# EAGLE board Main&MotorBoard (EAGLE 9.7.0)

Size 655.3 x 634.67 mm. Coordinates in mm from the lower left corner, seen from the top.
Outline: 0,3.81 650.22,0 655.3,630.86 5.08,634.67 0,3.81
Copper layers (1*16): Top / Bottom
Stack-up Default Layer Stack: Top User Defined 0.035mm / Dielectric-1 User Defined 1.5mm / Bottom User Defined 0.035mm
Design rules: minimum copper width class=1 24mil, minimum copper width class=0 18mil, minimum copper width 6mil, minimum drill size 0.35mm, copper clearance class=1 to class=1 16mil, copper clearance class=0 to class=0 14mil, copper clearance wire_polygon to wire_polygon 6mil, copper clearance wire_polygon to pad_smd 6mil, copper clearance wire_polygon to via 6mil, copper clearance pad_smd to pad_smd 6mil, copper clearance pad_smd to via 6mil, copper clearance via to via 6mil, copper clearance smd to pad (same net) 6mil, copper clearance smd to via (same net) 6mil, copper clearance smd to smd (same net) 6mil, dimension clearance 40mil, via restrict clearance 0mil, restrict clearance 0mil, drill distance 6mil, keepout clearance 0mil
Net classes: 0 Signal: width 0.457 mm, clearance 0.356 mm; 1 Power: width 0.61 mm, clearance 0.406 mm

## Footprints (pad centres in the part's own frame; a part is rotated, then mirrored left to right if it is on the bottom)
RASPBERRY_PI_PICO_PTH = drill 1 long: 1 -8.89,25.4; 2 -8.89,22.86; 3 -8.89,20.32; 4 -8.89,17.78; 5 -8.89,15.24; 6 -8.89,12.7; 7 -8.89,10.16; 8 -8.89,7.62; 9 -8.89,5.08; 10 -8.89,2.54; 11 -8.89,0; 12 -8.89,-2.54; 13 -8.89,-5.08; 14 -8.89,-7.62; 15 -8.89,-10.16; 16 -8.89,-12.7; 17 -8.89,-15.24; 18 -8.89,-17.78; 19 -8.89,-20.32; 20 -8.89,-22.86; 21 8.89,-22.86; 22 8.89,-20.32; 23 8.89,-17.78; 24 8.89,-15.24; 25 8.89,-12.7; 26 8.89,-10.16; 27 8.89,-7.62; 28 8.89,-5.08; 29 8.89,-2.54; 30 8.89,0; 31 8.89,2.54; 32 8.89,5.08; 33 8.89,7.62; 34 8.89,10.16; 35 8.89,12.7; 36 8.89,15.24; 37 8.89,17.78; 38 8.89,20.32; 39 8.89,22.86; 40 8.89,25.4; D1 -2.54,-22.63; D2 0,-22.63; D3 2.54,-22.63
0204/7 = drill 0.813 octagon: 1 -3.81,0; 2 3.81,0
C0805(N) = smd 1 x 1.424: 1 -0.935,0; 2 0.935,0
C0805(M) = smd 1.2 x 1.524: 1 -1.035,0; 2 1.035,0
C0805 = smd 1.3 x 1.5: 1 -0.95,0; 2 0.95,0
2X01-3.00MM-90° = drill 1.02 pad 1.778: 1 0,7.32; 2 0,4.32 | hole 3: 0,0
1X06-2.54MM = drill 1.016 long: 1 -6.35,0; 2 -3.81,0; 3 -1.27,0; 4 1.27,0; 5 3.81,0; 6 6.35,0
SW_DS01C-254-L-04BE = drill 1 pad 1.58 square: 1A -3.81,-3.81 | drill 1 pad 1.58: 1B -3.81,3.81; 2A -1.27,-3.81; 2B -1.27,3.81; 3A 1.27,-3.81; 3B 1.27,3.81; 4A 3.81,-3.81; 4B 3.81,3.81
E5-10,5 = drill 1.016 pad 2.54: + -2.54,0 | drill 1.016 pad 2.54 octagon: - 2.54,0
DO201-15(N) = drill 1.499 long: A 7.62,0; C -7.62,0
SMC = smd 2.8 x 3.8: A 3.7,0; C -3.7,0
7395-02 = drill 1.016 long: 1 1.27,0; 2 -1.27,0
2,8-PAD = drill 2.8 pad 5.334: B2,8 0,0
SAMTEC_MTMM-101-X-X-S-X = drill 0.89 pad 1.24: 01 0,0
DR127 = smd 3.85 x 5.5: 1 -4.975,0; 2 4.975,0
SML0402 = smd 0.6 x 0.6: 1 -0.55,0; 2 0.55,0
DIL04 = drill 0.813 long: 1 -1.27,-3.81; 2 1.27,-3.81; 3 1.27,3.81; 4 -1.27,3.81
TO254P1052X465X1989-3 = drill 1.34 pad 2.01: D 0,0; G -2.54,0; S 2.54,0
TO-236AB_NEX-M = smd 0.584 x 1.473: 1 -0.953,-1.079; 2 0.953,-1.079; 3 0,1.079
R0805 = smd 1.3 x 1.5: 1 -0.95,0; 2 0.95,0
C0603(M) = smd 0.762 x 1.062: 1 -0.75,0; 2 0.75,0
C1206(N) = smd 1.02 x 1.729: 1 -1.455,0; 2 1.455,0
2X04 = drill 1.016 octagon: 1 -3.81,-1.27; 2 -3.81,1.27; 3 -1.27,-1.27; 4 -1.27,1.27; 5 1.27,-1.27; 6 1.27,1.27; 7 3.81,-1.27; 8 3.81,1.27
B3F-10XX = drill 1.016 long: 1 -3.251,2.261; 2 3.251,2.261; 3 -3.251,-2.261; 4 3.251,-2.261
MULTIWATT-15 = drill 1.2 long: 1 -8.89,-7.62; 2 -7.62,-2.54; 3 -6.35,-7.62; 4 -5.08,-2.54; 5 -3.81,-7.62; 6 -2.54,-2.54; 7 -1.27,-7.62; 8 0,-2.54; 9 1.27,-7.62; 10 2.54,-2.54; 11 3.81,-7.62; 12 5.08,-2.54; 13 6.35,-7.62; 14 7.62,-2.54; 15 8.89,-7.62
TO263-5 = smd 1.067 x 2.159: FDB 1.702,-5.791; GND 0,-5.791; ON/OFF 3.404,-5.791; OUT -1.702,-5.791; VIN -3.404,-5.791 | smd 10.8 x 10.41: TAB 0,2.54
SOT230P700X170-4 = smd 1.86 x 0.898: 1 -3.075,2.3; 2 -3.075,0; 3 -3.075,-2.3 | smd 1.86 x 3.189: 4 3.075,0
SO14(M) = smd 2.265 x 0.642: 1 -2.525,3.81; 2 -2.525,2.54; 3 -2.525,1.27; 4 -2.525,0; 5 -2.525,-1.27; 6 -2.525,-2.54; 7 -2.525,-3.81; 8 2.525,-3.81; 9 2.525,-2.54; 10 2.525,-1.27; 11 2.525,0; 12 2.525,1.27; 13 2.525,2.54; 14 2.525,3.81

## Placement (x,y rotation side)
A1  RASPBERRY_PI_PICO_PTH  [RASPBERRY_PI_PICO_PTH]  335.28,339.09 0 top
BUZZER  [0204/7]  182.88,71.12 0 top
C1  100nF/50V/10%  [C0805(N)]  129.54,320.04 0 top
C2  100nF/50V/10%  [C0805(N)]  129.54,279.4 0 top
C3  100nF/50V/10%  [C0805(N)]  109.22,292.1 270 top
C4  100nF/50V/10%  [C0805(N)]  130.81,240.03 0 top
C5  100nF/50V/10%  [C0805(N)]  106.68,251.46 270 top
C6  100nF/25V/10%  [C0805(M)]  140.97,483.87 270 top
C6.1  100nF/50V/10%  [C0805]  505.46,292.1 0 top
C6.30  1uF/25V/10%  [C0805]  101.6,78.74 0 top
C6.31  100nF/50V/10%  [C0805]  102.87,71.12 0 top
C7  100nF/25V/10%  [C0805(M)]  148.59,483.87 270 top
C8  10uF/25V/10%  [C0805(M)]  125.73,406.4 90 top
C9  10uF/25V/10%  [C0805(M)]  153.67,406.4 90 top
C10  100nF/25V/10%  [C0805(M)]  219.71,453.39 90 top
C11  100nF/25V/10%  [C0805(M)]  114.3,444.5 270 top
C12  100nF/25V/10%  [C0805(M)]  114.3,406.4 90 top
C13  100nF/25V/10%  [C0805(M)]  166.37,406.4 90 top
C14  100nF/50V/10%  [C0805(N)]  107.95,330.2 270 top
C15  100nF/50V/10%  [C0805(M)]  354.33,369.57 0 top
C16  100nF/50V/10%  [C0805(M)]  542.29,448.31 0 top
C22  100nF/50V/10%  [C0805(M)]  499.11,400.05 0 top
CON1  [2X01-3.00MM-90°]  111.76,486.41 0 top
CON2  [2X01-3.00MM-90°]  187.96,306.07 270 top
CON3  [1X06-2.54MM]  529.59,332.74 0 top
CON4  [2X01-3.00MM-90°]  214.63,262.89 270 top
CON5  [2X01-3.00MM-90°]  184.15,332.74 270 top
CON6  [SW_DS01C-254-L-04BE]  153.67,186.69 0 top
CPOL1  330uF/25V/20%  [E5-10,5]  158.75,483.87 0 top
CPOL2  330uF/25V/20%  [E5-10,5]  175.26,483.87 0 top
CPOL6  100uF/35V/20%  [E5-10,5]  125.73,444.5 0 top
CPOL7  330uF/25V/20%  [E5-10,5]  173.99,453.39 90 top
CPOL8  330uF/25V/20%  [E5-10,5]  191.77,453.39 90 top
CPOL9  330uF/25V/20%  [E5-10,5]  208.28,453.39 90 top
D0  [DO201-15(N)]  166.37,326.39 0 top
D1  [DO201-15(N)]  204.47,326.39 0 top
D2  [DO201-15(N)]  166.37,337.82 0 top
D3  [DO201-15(N)]  204.47,337.82 0 top
D4  [DO201-15(N)]  167.64,299.72 0 top
D5  [DO201-15(N)]  199.39,288.29 0 top
D6  [DO201-15(N)]  179.07,288.29 0 top
D7  [DO201-15(N)]  158.75,288.29 0 top
D8  [DO201-15(N)]  194.31,252.73 0 top
D9  [DO201-15(N)]  173.99,252.73 0 top
D10  [DO201-15(N)]  153.67,252.73 0 top
D11  [DO201-15(N)]  168.91,243.84 0 top
D13  40V/3A  [SMC]  138.43,434.34 180 top
EMISSOR  22-05-7028-02  [7395-02]  417.83,449.58 0 top
HL1  MOUNT-PAD-ROUND2.8  [2,8-PAD]  223.52,487.68 0 top
HL2  MOUNT-PAD-ROUND2.8  [2,8-PAD]  223.52,480.06 0 top
HL3  MOUNT-PAD-ROUND2.8  [2,8-PAD]  223.52,472.44 0 top
J1  PIN_HEADE_1  [SAMTEC_MTMM-101-X-X-S-X]  175.26,415.29 0 top
J2  PIN_HEADE_1  [SAMTEC_MTMM-101-X-X-S-X]  233.68,461.01 0 top
J3  PIN_HEADE_1  [SAMTEC_MTMM-101-X-X-S-X]  191.77,491.49 0 top
J4  PIN_HEADE_1  [SAMTEC_MTMM-101-X-X-S-X]  191.77,481.33 0 top
L2  100uH/1.96A/20%  [DR127]  167.64,436.88 180 top
LED1  GREEN  [SML0402]  167.64,93.98 0 top
LED2  GREEN  [SML0402]  167.64,85.09 0 top
LED3  GREEN  [SML0402]  530.86,323.85 0 top
LED4  RED  [SML0402]  171.45,68.58 0 top
LED5  GREEN  [SML0402]  491.49,320.04 0 top
LED6  GREEN  [SML0402]  487.68,320.04 0 top
OC1  [DIL04]  581.66,304.8 0 top
OC2  [DIL04]  574.04,304.8 0 top
Q1  IRF9540  [TO254P1052X465X1989-3]  129.54,487.68 0 top
Q2  2N7002  [TO-236AB_NEX-M]  177.8,62.23 0 top
R1.3  1MR/0.25w/5%  [R0805]  161.29,106.68 0 top
R1.4  100kR/0.25w/5%  [R0805]  177.8,106.68 0 top
R2  330R/0.25W/5%  [C0603(M)]  160.02,93.98 0 top
R3  130R/0.25W/5%  [C0603(M)]  160.02,85.09 0 top
R4  10kR/0.25W/5%  [C0805(M)]  127,477.52 90 top
R4.8  47R/0.25W/5%  [C0805(M)]  449.58,454.66 0 top
R4.9  1MR/0.25W/5%  [C0805(M)]  448.31,429.26 0 top
R5  0R/0.25W/5%  [C0805(M)]  175.26,406.4 0 top
R6  330R/0.25W/5%  [C0805(M)]  528.32,316.23 0 top
R6.1  100R/0.25W/5%  [C0805(M)]  173.99,161.29 0 top
R6.2  100R/0.25W/5%  [C0805(M)]  158.75,161.29 0 top
R6.3  100R/0.25W/5%  [C0805(M)]  143.51,161.29 0 top
R6.4  100R/0.25W/5%  [C0805(M)]  128.27,161.29 0 top
R6.5  10kR/0.25W/5%  [C0805(M)]  128.27,142.24 0 top
R6.6  10kR/0.25W/5%  [C0805(M)]  144.78,140.97 0 top
R6.7  10kR/0.25W/5%  [C0805(M)]  160.02,140.97 0 top
R6.8  10kR/0.25W/5%  [C0805(M)]  173.99,140.97 0 top
R6.12  10kR/0.25W/5%  [C0805(M)]  95.25,105.41 180 top
R7  0R/0.25W/5%  [C0805(M)]  228.6,453.39 270 top
R8  130R/0.25W/5%  [C0603(M)]  476.25,330.2 0 top
R8.1  10kR/0.25W/5%  [C0805(M)]  467.36,314.96 0 top
R8.2  10kR/0.25W/5%  [C0805(M)]  452.12,314.96 0 top
R8.3  10kR/0.25W/5%  [C0805(M)]  436.88,314.96 0 top
R8.4  10kR/0.25W/5%  [C0805(M)]  439.42,328.93 0 top
R8.5  10kR/0.25W/5%  [C0805(M)]  585.47,292.1 0 top
R8.6  10kR/0.25W/5%  [C0805(M)]  570.23,292.1 0 top
R8.26  270R/0.25W/5%  [C0805(M)]  160.02,71.12 0 top
R8.27  10kR/0.25W/5%  [C0805(M)]  177.8,53.34 180 top
R8.30  82 OHM  [C0805(M)]  581.66,325.12 0 top
R8.32  82 OHM  [C0805(M)]  572.77,325.12 0 top
R9  130R/0.25W/5%  [C0603(M)]  461.01,330.2 0 top
R11  330R/0.25W/5%  [C1206(N)]  525.78,443.23 0 top
R12  330R/0.25W/5%  [C1206(N)]  467.36,406.4 0 top
R13  10kR/0.25W/5%  [C1206(N)]  452.12,406.4 0 top
R14  10kR/0.25W/5%  [C1206(N)]  525.78,450.85 0 top
RADIO0  nRF24L01+  [2X04]  99.06,93.98 0 top
RECEPTOR  22-05-7028-02  [7395-02]  417.83,430.53 0 top
SH1  RESET  [B3F-10XX]  485.14,407.67 0 top
SH3  RESET  [B3F-10XX]  510.54,448.31 0 top
U1  LN298  [MULTIWATT-15]  125.73,297.18 0 top
U2  LN298  [MULTIWATT-15]  125.73,256.54 0 top
U3  LM2576HVT - 5.0V  [TO263-5]  152.4,455.93 0 top
U4  LM11117-3.3V  [SOT230P700X170-4]  139.7,406.4 0 top
U5  LN298  [MULTIWATT-15]  124.46,335.28 0 top
U6  CD4066BSO14  [SO14(M)]  422.91,328.93 0 top

## Library data of the parts
A1 = WarthogRobotics-Modules
BUZZER = rcl; SPICEPREFIX: R
C1-C16 C22 CPOL1 CPOL2 CPOL6-CPOL9 R2-R4 R4.8 R4.9 R5 R6 R6.1-R6.8 R6.12 R7 R8 R8.1-R8.6 R8.26 R8.27 R8.30 R8.32 R9 R11-R14 = WarthogRobotics-RLC
C6.1 C6.30 C6.31 = rcl
CON1-CON5 = WarthogRobotics-Connectors
CON6 = WarthogRobotics-Connectors; AVAILABILITY: In Stock; CHECK_PRICES: https://www.snapeda.com/parts/DS01C-254-L-04BE/CUI+Devices/view-part/?ref=eda; CUI_PURCHASE_URL: https://www.cuidevices.com/product/switches/dip-switches/ds01c-254-l-04be?utm_source=snapeda.com&utm_medium=referral&utm_campaign=snapedaBOM; DESCRIPTION: 4 Position, Through Hole, 2.54 mm Pitch, Raised Slide Actuator, Convex Bottom, Long Pin, DIP Switch; MF: CUI Devices; MP: DS01C-254-L-04BE; PACKAGE: None; PRICE: None; SNAPEDA_LINK: https://www.snapeda.com/parts/DS01C-254-L-04BE/CUI+Devices/view-part/?ref=snap
D0 D1-D11 = WarthogRobotics-Diodes
D13 L2 Q1 = Auriga_lib
EMISSOR RECEPTOR = EP_molex_6410_7395 (1)
HL1-HL3 = WarthogRobotics-Holes
J1-J4 = Library
LED1-LED6 = WarthogRobotics-LED
OC1 OC2 = optocoupler
Q2 = WarthogRobotics-Transistors; COPYRIGHT: Copyright (C) 2016 Accelerated Designs. All rights reserved; MANUFACTURER_PART_NUMBER: 2N7002,215; SOURCELIBRARY: Nexperia_2018-05-2018; VENDOR: Nexperia
R1.3 R1.4 = rcl-2
RADIO0 = pinhead
SH1 SH3 = BUCK_LM2576
U1 U2 U5 = st-microelectronics; MPN: L298N; OC_FARNELL: 1589425; OC_NEWARK: 32M1527
U3 U4 = WarthogRobotics-IC-Power
U6 = WarthogRobotics-IC-Special_Function

## Nets
1_LED: A1.22 R8.2.1 U6.6
2_LED: A1.21 R8.1.1 U6.12
3.3V [Power]: A1.39 C6.1.1 C6.30.2 C6.31.2 C15.1 CON3.6 CON6.1B CON6.2B CON6.3B CON6.4B OC1.4 OC2.4 R3.1 R4.8.2 R4.9.2 R5.2 R6.12.2 R13.2 R14.2 RADIO0.2 U6.1 U6.4 U6.7 U6.8 U6.11
3.3V_LED: CON3.1 R6.1
5.0V [Power]: BUZZER.1 C1.1 C2.1 C4.1 C8.1 C12.1 R2.1 R7.2 R8.26.1 U1.6 U1.9 U1.11 U2.6 U2.9 U2.11 U4.3 U5.6 U5.9 U5.11
A: R8.6.1 R8.30.2 U6.2
B: R8.5.1 R8.32.2 U6.3
BALL_SENSOR: A1.31 R4.9.1 RECEPTOR.2
FDB: C10.1 CPOL7.+ CPOL8.+ CPOL9.+ J2.01 L2.1 R7.1 U3.FDB
GND [Power]: A1.3 A1.8 A1.13 A1.18 A1.23 A1.28 A1.33 A1.38 A1.D2 C1.2 C2.2 C3.2 C4.2 C5.2 C6.1.2 C6.2 C6.30.1 C6.31.1 C7.2 C8.2 C9.2 C10.2 C11.2 C12.2 C13.2 C14.2 C15.2 C16.2 C22.2 CON1.2 CON3.2 CPOL1.- CPOL2.- CPOL6.- CPOL7.- CPOL8.- CPOL9.- D1.A D3.A D5.A D7.A D9.A D11.A D13.A EMISSOR.1 HL1.B2,8 HL2.B2,8 HL3.B2,8 J4.01 LED1.1 LED2.1 LED3.1 LED5.1 LED6.1 OC1.2 OC2.2 Q2.2 R1.4.2 R4.2 R6.5.1 R6.6.1 R6.7.1 R6.8.1 R8.1.2 R8.2.2 R8.3.2 R8.4.2 R8.5.2 R8.6.2 R8.27.1 RADIO0.1 RECEPTOR.1 SH1.3 SH1.4 SH3.3 SH3.4 U1.1 U1.8 U1.15 U2.1 U2.8 U2.15 U3.GND U3.ON/OFF U3.TAB U4.1 U5.1 U5.8 U5.15 U6.14
LOW_BAT_WARN: A1.17 Q2.1 R8.27.2
M0_OUTPUT_H: CON5.1 D2.A D3.C U5.2 U5.14
M0_OUTPUT_L: CON5.2 D0.A D1.C U5.3 U5.13
M0_PWM_H: U5.5 U5.12
M0_PWM_L: U5.7 U5.10
M1_OUTPUT_H: CON2.1 D6.A D7.C U1.2 U1.14
M1_OUTPUT_L: CON2.2 D4.A D5.C U1.3 U1.13
M1_PWM_H: A1.1 A1.19 U1.5 U1.12
M1_PWM_L: A1.2 A1.20 U1.7 U1.10
M2_OUTPUT_H: CON4.1 D10.A D11.C U2.2 U2.14
M2_OUTPUT_L: CON4.2 D8.A D9.C U2.3 U2.13
M2_PWM_H: A1.26 U2.5 U2.12
M2_PWM_L: A1.27 U2.7 U2.10
MISO: A1.12 RADIO0.7
MOSI: A1.14 RADIO0.6
N$1: SH1.2
N$2: LED1.2 R2.2
N$3: LED2.2 R3.2
N$4: LED3.2 R6.2
N$5: CON1.1 Q1.S
N$6 [Power]: EMISSOR.2 R4.8.1
N$7: Q1.G R4.1
N$8 [Power]: BUZZER.2 LED4.1 Q2.3
N$9: LED4.2 R8.26.2
N$10: OC1.1 R8.30.1
N$11 [Power]: D13.C L2.2 U3.OUT
N$12: LED5.2 R8.2
N$13: LED6.2 R9.2
N$14: R8.1 U6.10
N$15: R9.1 U6.9
N$16: R12.1 R13.1 SH1.1
N$21: R11.1 R14.1 SH3.1
N$22: SH3.2
N$23: OC2.1 R8.32.1
N$31 [Power]: CON6.1A R6.4.2 R6.5.2
N$35 [Power]: CON6.2A R6.3.2 R6.6.2
N$37 [Power]: CON6.3A R6.2.1 R6.7.2
N$58 [Power]: CON6.4A R6.1.1 R6.8.2
OUT_3.3: C9.1 C13.1 J1.01 R5.1 U4.2 U4.4
PLAYER1: A1.4 R6.4.1
PLAYER2: A1.5 R6.3.1
PLAYER3: A1.6 R6.2.2
PLAYER4: A1.7 R6.1.2
PWM_CHARGE: A1.25 R8.3.1 U6.5
PWM_CHARGE_OPTO: CON3.3 OC2.3
PWM_KICK: A1.24 R8.4.1 U6.13
PWM_KICK_OPTO: CON3.4 OC1.3
R_CE: A1.9 RADIO0.3
RESET: A1.30 C22.1 R12.2
SCLK: A1.11 RADIO0.5
SHOOT_BUTTOM: A1.29 C16.1 R11.2
SS: A1.10 R6.12.1 RADIO0.4
SWCLK: A1.D1
SWDIO: A1.D3
V_BAT: C3.1 C5.1 C6.1 C7.1 C11.1 C14.1 CPOL1.+ CPOL2.+ CPOL6.+ D0.C D2.C D4.C D6.C D8.C D10.C J3.01 Q1.D R1.3.1 U1.4 U2.4 U3.VIN U5.4
V_BAT_VALUE: A1.15 R1.3.2 R1.4.1
V_CAP_VALUE: A1.16 CON3.5

## Tracks (layer width: path | path; a pad name or v marks a point on that pad's centre or on a via)
1_LED  (2 unrouted)
2_LED  (2 unrouted)
3.3V  (24 unrouted)
3.3V_LED  (1 unrouted)
5.0V  (18 unrouted)
A  (2 unrouted)
B  (2 unrouted)
BALL_SENSOR  (2 unrouted)
FDB  (7 unrouted)
GND  (89 unrouted)
LOW_BAT_WARN  (2 unrouted)
M0_OUTPUT_H  (4 unrouted)
M0_OUTPUT_L  (4 unrouted)
M0_PWM_H  (1 unrouted)
M0_PWM_L  (1 unrouted)
M1_OUTPUT_H  (4 unrouted)
M1_OUTPUT_L  (4 unrouted)
M1_PWM_H  (3 unrouted)
M1_PWM_L  (3 unrouted)
M2_OUTPUT_H  (4 unrouted)
M2_OUTPUT_L  (4 unrouted)
M2_PWM_H  (2 unrouted)
M2_PWM_L  (2 unrouted)
MISO  (1 unrouted)
MOSI  (1 unrouted)
N$2  (1 unrouted)
N$3  (1 unrouted)
N$4  (1 unrouted)
N$5  (1 unrouted)
N$6  (1 unrouted)
N$7  (1 unrouted)
N$8  (2 unrouted)
N$9  (1 unrouted)
N$10  (1 unrouted)
N$11  (2 unrouted)
N$12  (1 unrouted)
N$13  (1 unrouted)
N$14  (1 unrouted)
N$15  (1 unrouted)
N$16  (2 unrouted)
N$21  (2 unrouted)
N$23  (1 unrouted)
N$31  (2 unrouted)
N$35  (2 unrouted)
N$37  (2 unrouted)
N$58  (2 unrouted)
OUT_3.3  (4 unrouted)
PLAYER1  (1 unrouted)
PLAYER2  (1 unrouted)
PLAYER3  (1 unrouted)
PLAYER4  (1 unrouted)
PWM_CHARGE  (2 unrouted)
PWM_CHARGE_OPTO  (1 unrouted)
PWM_KICK  (2 unrouted)
PWM_KICK_OPTO  (1 unrouted)
R_CE  (1 unrouted)
RESET  (2 unrouted)
SCLK  (1 unrouted)
SHOOT_BUTTOM  (2 unrouted)
SS  (2 unrouted)
V_BAT  (21 unrouted)
V_BAT_VALUE  (2 unrouted)
V_CAP_VALUE  (1 unrouted)